# Altium PCB BACK_UP_05_10_Analizador_de_espectro.PcbDoc (part 1 of 2)
Units mil, origin at the board's own origin, x right, y up, seen from the top; angles counter-clockwise.
Board outline 6000 x 4000 mil, 2 copper layers (Top Layer, Bottom Layer); 140 components, 98 nets, 612 pads, 248 vias.
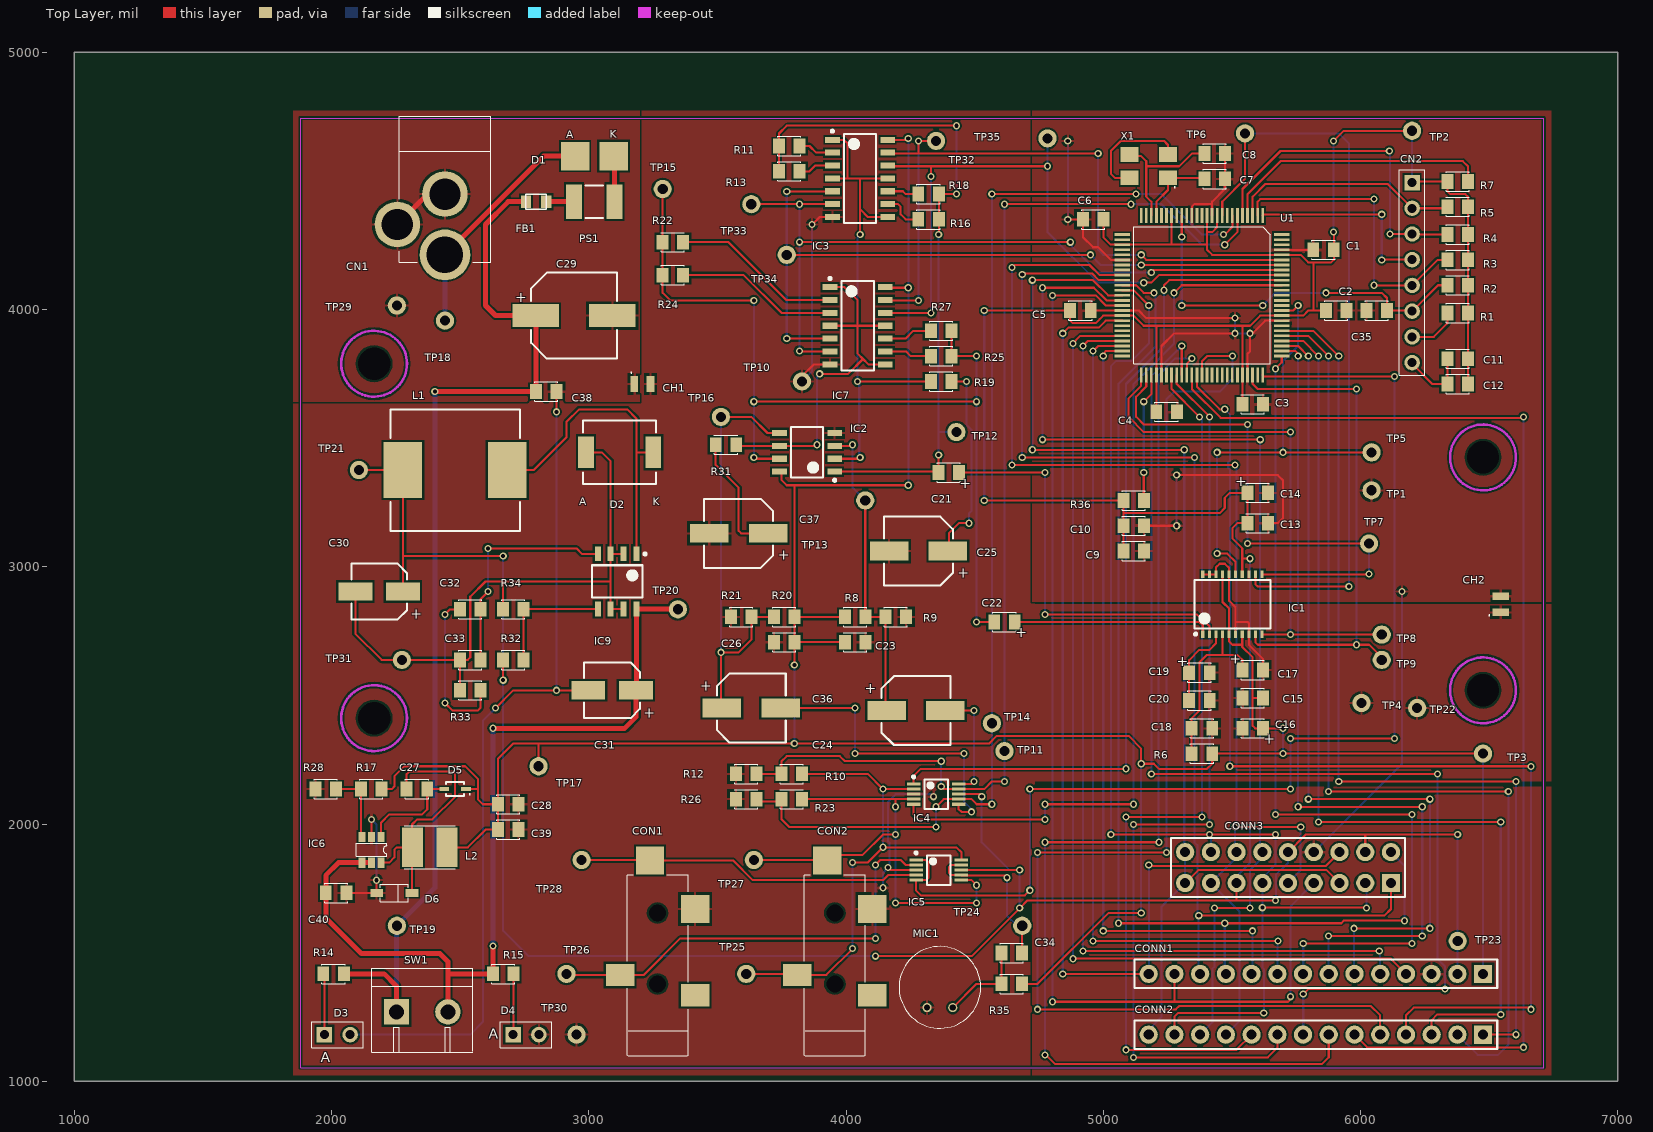
[diagram p0: Top Layer view]
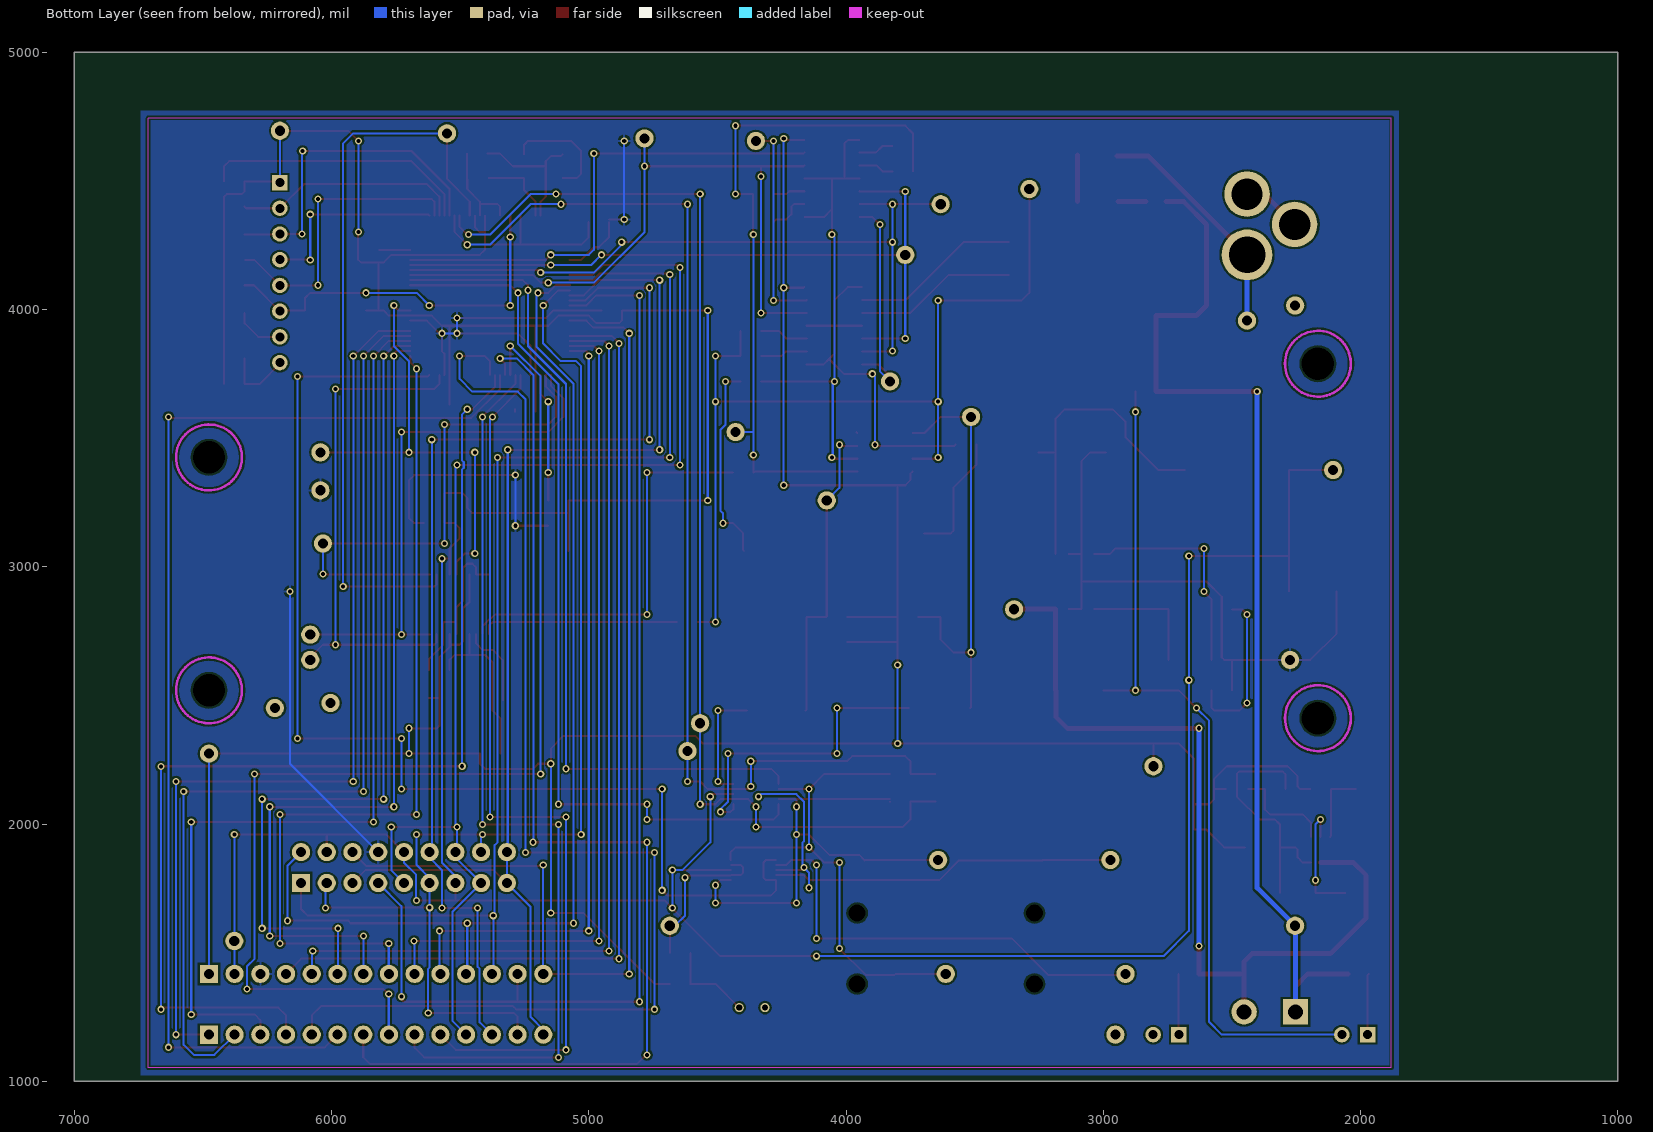
[diagram p1: Bottom Layer view, seen from below]

## Layer stack, top to bottom
Top Solder: solder mask 0.4, Solder Resist, Dk 3.5
Top Layer: signal copper 1.4
Dielectric 1: dielectric 12.6, FR-4, Dk 4.8
Bottom Layer: signal copper 1.4
Bottom Solder: solder mask 0.4, Solder Resist, Dk 3.5

## Board outline
1000,1000 7000,1000 7000,5000 1000,5000

## Design rules (kind name [scope] priority, off if disabled: settings)
Clearance [All] p1: gap=7.87
HoleSize [All] p1: absolutevalues=TRUE maxlimit=200 minlimit=1 maxpercent=80.000 minpercent=20.000
MinimumSolderMaskSliver [All] p1: minsoldermaskwidth=0.79
PolygonConnect [All] p1: connectstyle=Relief reliefconductorwidth=10 reliefentries=4 polygonreliefangle="90 Angle" airgapwidth=10
RoutingVias [All] p1: holewidth=16 width=28 viastyle="Through Hole" minholewidth=16 minwidth=28 maxholewidth=16 maxwidth=28
SolderMaskExpansion [All] p1: expansion=4
Width [All] p1: maxlimit=250 minlimit=8 preferedwidth=8
28 further rules are at their usual default settings.

## Classes and differential pairs
component class U_adc: C13 C14 C15 C16 C17 C18 C19 C20 C21 C22 IC1 R6 TP1 TP2 TP3 TP4 TP5 TP6 TP7 TP8 TP9 TP10
component class U_AGC: C23 C24 C25 C26 C36 C37 IC2 IC3 IC4 IC7 R8 R9 R10 R11 R12 R13 R16 R18 R19 R20 R21 R22 R23 R24 R25 R26 R27 R31 TP11 TP12 TP13 TP14 TP15 TP16 TP32 TP33 TP34 TP35
component class U_Fuente: C27 C28 C29 C30 C31 C32 C33 C38 C39 C40 CH1 CH2 CN1 D1 D2 D3 D4 D5 D6 FB1 IC6 IC9 L1 L2 PS1 R14 R15 R17 R28 R32 R33 R34 SW1 TP17 TP18 TP19 TP20 TP21 TP29 TP30 TP31
component class U_Signal_imputs: C34 CON1 CON2 IC5 MIC1 R35 TP22 TP23 TP24 TP25 TP26 TP27 TP28
component class U_uc: c1 c2 c4 C4 c5 c6 c7 c8 c9 c10 c11 C12 c35 CN2 CONN1 CONN2 CONN3 R1 R2 R3 R4 R5 R7 R36 U1 X1

## Components (designator, comment, footprint, x,y, rotation, side; value= is the part's Value field where it differs from the comment)
C1 "100nF 25V X7R Ceramic" C_0805 5856.3,4232.28 r180 top (schematic designator c1)
C2 "100nF 25V X7R Ceramic" C_0805 5905.51,3996.06 r0 top (schematic designator c2)
C3 "100nF 25V X7R Ceramic" C_0805 5580.71,3631.89 r0 top (schematic designator c3)
C4 "100nF 25V X7R Ceramic" C_0805 5246.06,3602.36 r0 top (schematic designator c4)
C5 "100nF 25V X7R Ceramic" C_0805 4911.42,3996.06 r0 top (schematic designator c5)
C6 "100nF 25V X7R Ceramic" C_0805 4960.63,4350.39 r180 top (schematic designator c6)
C7 "18pF 50V COG Ceramic" C_0805 5433.07,4507.87 r180 top (schematic designator c7)
C8 "18pF 50V COG Ceramic" C_0805 5433.07,4606.3 r180 top (schematic designator c8)
C9 "1uF 6V3 X7R Ceramic" C_0805 5118.11,3061.02 r0 top (schematic designator c9)
C10 "10nF 25V X7R Ceramic" C_0805 5118.11,3159.45 r0 top (schematic designator c10)
C11 "10nF 25V X7R Ceramic" C_0805 6377.95,3809.06 r180 top (schematic designator c11)
C12 "100nF 25V X7R Ceramic" C_0805 6377.95,3710.63 r180 top (schematic designator c12)
C13 "100nF 16V Ceramic" C_0805 5600.39,3169.29 r180 top
C14 "10uF 6V3 Tantalium" C_0805_POL 5600.39,3287.4 r0 top
C15 "100nF 16V Ceramic" C_0805 5580.71,2490.16 r0 top
C16 "10uF 6V3 Tantalium" C_0805_POL 5580.71,2372.05 r180 top
C17 "10uF 6V3 Tantalium" C_0805_POL 5580.71,2598.43 r0 top
C18 "100nF 16V Ceramic" C_0805 5383.86,2372.05 r180 top
C19 "10uF 6V3 Tantalium" C_0805_POL 5374.02,2588.58 r0 top
C20 "100nF 16V Ceramic" C_0805 5374.02,2480.32 r180 top
C21 "1uF 16V Tantalium" C_0805_POL 4399.61,3366.14 r180 top
C22 "1uF 16V Tantalium" C_0805_POL 4616.14,2785.43 r180 top
C23 "1uF 16V Ceramic" C_0805 4035.43,2706.69 r0 top
C24 "100uF 16V Elect. Alum." C_AE7066X54M 4271.65,2440.94 r0 top
C25 "100uF 16V Elect. Alum." C_AE7066X54M 4281.5,3061.02 r180 top
C26 "1uF 16V Ceramic" C_0805 3760.47,2706.69 r180 top
C27 "100nF 16V X7R" C_0805 2332.05,2135.83 r180 top
C28 "10uF 10V X7R" C_0805 2687.01,2076.77 r0 top
C29 "100uF 50V ElecAlum" C_AE10083X105M 2942.91,3976.38 r0 top
C30 "100uF 6V3 ElecAlum" C_AE6553X54M 2185.04,2903.54 r180 top
C31 "4.7uF 50V ElecAlum" C_AE6553X54M 3090.55,2519.68 r180 top
C32 "15nF 50V Ceramic" C_0805 2539.37,2834.65 r180 top
C33 "100pF 25V Ceramic" C_0805 2539.37,2637.8 r180 top
C34 "2.2u 6V3 X5R Ceramic" C_0805 4644.84,1498.43 r0 top
C35 "100nF 25V X7R Ceramic" C_0805 6062.99,3996.06 r180 top (schematic designator c35)
C36 "100uF 16V Elect. Alum." C_AE7066X54M 3631.89,2450.79 r0 top
C37 "100uF 16V Elect. Alum." C_AE7066X54M 3582.68,3129.92 r180 top
C38 "100nF 35V Ceramic" C_0805 2834.65,3681.1 r0 top
C39 "10uF 10V X7R" C_0805 2687.01,1978.35 r0 top
C40 "2.2uF 50V X7R" C_0805 2017.72,1732.28 r0 top
CH1 "Choke" I_CHOQUE_DFN 3208.66,3710.63 r0 top
CH2 "Choke" I_CHOQUE_DFN 6545.28,2854.33 r90 top
CN1 "DC Jack" Jack_PJ002A 2440.95,4212.6 r90 top
CN2 "CONN_82" HDR_M_08P_0.1 6200.79,4143.7 r270 top
CON1 "AUD_IN" "AUDIO_JACK 3.5MM SMD" 3267.72,1515.75 r90 top
CON2 "AUD_IN" "AUDIO_JACK 3.5MM SMD" 3956.69,1515.75 r90 top
CONN1 "CON_14" "1x14x2.54 Pin Header TH V" 5826.77,1417.32 r180 top
CONN2 "CON_14" "1x14x2.54 Pin Header TH V" 5826.77,1181.1 r180 top
CONN3 "CON_18" "2x9x2.54 Pin Header TH V" 5718.5,1830.71 r180 top
D1 "CDBA140-G" D_DO-214AC_SCHOTTKY 3021.65,4596.46 r0 top
D2 "STPS3L40" D_M6959X25N 3120.08,3444.88 r0 top
D3 "LED" LED_TH 2022.44,1181.1 r0 top
D4 "LED" LED_TH 2755.91,1181.1 r0 top
D5 "1N4148WS" 1N4148WS 2480.32,2135.83 r180 top
D6 "MBRX160TP" SOD_123 2244.09,1732.28 r180 top
FB1 "Ferrite Bead" Ferrite_bead 2834.65,4419.29 r180 top
IC1 "PCM1802" SSOP_DB20 5501.97,2854.33 r90 top
IC2 "MCP6022" SOIC_D8 3848.43,3444.88 r180 top
IC3 "74LVC4066" SO14 4054.53,4509.8 r0 top
IC4 "TS5A23157" TSSOP50P490X110-10N 4350.39,2116.14 r0 top
IC5 "TS5A23157" TSSOP50P490X110-10N 4360.24,1820.87 r0 top
IC6 "MCP" SOT23_6P 2155.51,1899.61 r180 top
IC7 "74LVC4066" SO14 4045.28,3937.01 r0 top
IC9 "L5972D" SO8 3110.24,2942.91 r270 top
L1 "47uH" I_P128122X60N 1466.54,3917.32 r180 top
L2 "LQH44PN220MP0L" VLCF5028 2381.89,1909.45 r0 top
MIC1 "Mic" MIC_CMA-4544PF-W 4365,1365 r270 top
PS1 "Polyswitch" POLISWITCH_1 3021.65,4419.29 r180 top
R1 "10k 5% 1/8W" R_0805 6377.95,3986.22 r0 top
R2 "10k 5% 1/8W" R_0805 6377.95,4094.49 r0 top
R3 "10k 5% 1/8W" R_0805 6377.95,4192.91 r0 top
R4 "10k 5% 1/8W" R_0805 6377.95,4291.34 r0 top
R5 "10k 5% 1/8W" R_0805 6377.95,4399.61 r0 top
R6 "1k 1/8W" R_0805 5383.86,2273.62 r180 top
R7 "10k 5% 1/8W" R_0805 6377.95,4498.03 r180 top
R8 "100k 1/8W" R_0805 4036.06,2805.12 r180 top
R9 "100k 1/8W" R_0805 4193.54,2805.12 r180 top
R10 "100k 1/8W" R_0805 3789.37,2194.88 r180 top
R11 "590 1/8W" R_0805 3779.53,4635.83 r0 top
R12 "33k 1/8W" R_0805 3612.2,2194.88 r180 top
R13 "2k2 1/8W" R_0805 3779.53,4537.4 r0 top
R14 "Res1" R_0805 2007.87,1417.32 r180 top
R15 "Res1" R_0805 2667.32,1417.32 r180 top
R16 "3k9 1/8W" R_0805 4320.87,4350.39 r180 top
R17 "30k9 1%" R_0805 2154.88,2135.83 r0 top
R18 "100k 1/8W" R_0805 4320.87,4448.82 r180 top
R19 "1k 1/8W" R_0805 4370.08,3720.47 r0 top
R20 "100k 1/8W" R_0805 3760.47,2805.12 r0 top
R21 "100k 1/8W" R_0805 3593.15,2805.12 r0 top
R22 "590 1/8W" R_0805 3326.77,4261.81 r0 top
R23 "100k 1/8W" R_0805 3789.37,2096.46 r180 top
R24 "2k2 1/8W" R_0805 3326.77,4133.86 r0 top
R25 "3k9 1/8W" R_0805 4370.08,3818.9 r180 top
R26 "33k 1/8W" R_0805 3612.2,2096.46 r180 top
R27 "100k 1/8W" R_0805 4370.08,3917.32 r180 top
R28 "30k9 1%" R_0805 1977.72,2135.83 r0 top
R31 "1k 1/8W" R_0805 3533.46,3474.41 r180 top
R32 "8k2 1/4W" R_0805 2706.69,2637.8 r0 top
R33 "10k 1/4W" R_0805 2539.37,2519.68 r0 top
R34 "5k1 1/4W" R_0805 2706.69,2834.65 r0 top
R35 "2k2 1/8W" R_0805 4644.84,1378.43 r0 top
R36 "10k 5% 1/8W" R_0805 5118.11,3257.87 r180 top
SW1 "Switch" BORNERA_2X5MM 2352.36,1269.68 r180 top
TP1 "TP" TP 6043.31,3297.24 r0 top
TP2 "TP" TP 6200.79,4694.88 r0 top
TP3 "TP" TP 6476.38,2273.62 r0 top
TP4 "TP" TP 6003.94,2470.47 r0 top
TP5 "TP" TP 6043.31,3444.88 r0 top
TP6 "TP" TP 5551.18,4685.04 r0 top
TP7 "TP" TP 6033.46,3090.55 r0 top
TP8 "TP" TP 6082.68,2736.22 r0 top
TP9 "TP" TP 6082.68,2637.8 r0 top
TP10 "TP" TP 3828.74,3720.47 r90 top
TP11 "TP" TP 4616.14,2283.46 r0 top
TP12 "TP" TP 4429.13,3523.62 r90 top
TP13 "TP" TP 4074.8,3257.87 r90 top
TP14 "TP" TP 4566.93,2391.73 r90 top
TP15 "TP" TP 3287.4,4468.5 r90 top
TP16 "TP" TP 3513.78,3582.68 r90 top
TP17 "TP" TP 2805.12,2224.41 r90 top
TP18 "TP" TP 2440.94,3956.69 r90 top
TP19 "TP" TP 2253.94,1604.33 r90 top
TP20 "TP" TP 3346.46,2834.65 r90 top
TP21 "TP" TP 2106.3,3375.98 r0 top
TP22 "TP" TP 6220.47,2450.79 r90 top
TP23 "TP" TP 6377.95,1545.28 r90 top
TP24 "TP" TP 4685.04,1604.33 r90 top
TP25 "TP" TP 3612.2,1417.32 r90 top
TP26 "TP" TP 2913.39,1417.32 r90 top
TP27 "TP" TP 3641.73,1860.24 r90 top
TP28 "TP" TP 2972.44,1860.24 r90 top
TP29 "TP" TP 2253.94,4015.75 r90 top
TP30 "TP" TP 2952.76,1181.1 r90 top
TP31 "TP" TP 2273.62,2637.8 r0 top
TP32 "TP" TP 4350.39,4655.51 r90 top
TP33 "TP" TP 3631.89,4409.45 r90 top
TP34 "TP" TP 3769.69,4212.6 r90 top
TP35 "TP" TP 4783.46,4665.35 r90 top
U1 "LPC1769FBD100" LQFP100 5383.86,4055.12 r180 top
X1 "XTAL_HF" ABMC_XTAL 5177.17,4557.09 r180 top

## Footprints (in the part's own frame and the unit in brackets; to place one, negate y for a bottom-side part, rotate by r counter-clockwise, add the part's x,y. Pads: shape width x height; smd on the part's side, far side on the other; paste and mask are expansions set on the pad)
1N4148WS [mm] "SODFL, 2-Leads, Body 1.25x2.50mm, IPC Medium Density"
  rect 0.95x0.4 smd: 1(-1.075,0) 2(1.075,0)
  silkscreen extent -1.5,-0.7 0.9,0.7, body extent -0.9,-0.67 0.9,0.67, height 0.9
"1x14x2.54 Pin Header TH V" [mm] "1x14x2.54 Pin Header TH V"
  rect 1.8x1.8 hole 1: 1(-16.51,0)
  round 1.8 hole 1: 2(-13.97,0) 3(-11.43,0) 4(-8.89,0) 5(-6.35,0) 6(-3.81,0) 7(-1.27,0) 8(1.27,0) 9(3.81,0) 10(6.35,0) 11(8.89,0) 12(11.43,0) 13(13.97,0) 14(16.51,0)
  silkscreen extent -17.91,-1.4 17.91,1.4
"2x9x2.54 Pin Header TH V" [mm] "2x9x2.54 Pin Header TH V"
  rect 1.8x1.8 hole 1: 1(-10.16,1.524)
  round 1.8 hole 1: 2(-7.62,1.524) 3(-5.08,1.524) 4(-2.54,1.524) 5(0,1.524) 6(2.54,1.524) 7(5.08,1.524) 8(7.62,1.524) 9(10.16,1.524) 10(-10.16,-1.524) 11(-7.62,-1.524) 12(-5.08,-1.524) 13(-2.54,-1.524) 14(0,-1.524) 15(2.54,-1.524) 16(5.08,-1.524) 17(7.62,-1.524) 18(10.16,-1.524)
  silkscreen extent -11.56,-2.92 11.56,2.92
ABMC_XTAL [mm] "ABM3C-12.000MHZ-D4Y-T"
  rect 1.75x1.45 smd: 1(-1.9,1.15) 2(-1.9,-1.15) 3(1.9,-1.15) 4(1.9,1.15)
  silkscreen extent -2.63,2.03 -2.53,2.12, body extent -2.58,-1.68 2.57,1.68, height 1.3
"AUDIO_JACK 3.5MM SMD" [mm] "SJ-3524-SMT"
  rect 2.8x2.8 smd: 1(3.9,-3.7) 2(8.7,0.75)
  rect 2.2x2.8 smd: 3(-2.6,3.7) 4(-4.6,-3.7)
  round 0 hole 1.7: ""(-3.5,0) ""(3.5,0)
  silkscreen extent -10.6,-3 7.3,3
BORNERA_2X5MM [mm]
  rect 2.5x2.5 hole 1.5: 1(2.54,0)
  round 2.5 hole 1.5: 2(-2.54,0)
  silkscreen extent -5,-4.3 5,4
C_0805 [mm]
  rect 0.5x1.25 on Mech3: 0(-0.75,0) 0(0.75,0)
  rect 1.175x1.45 smd: 1(-1.016,0) 2(1.016,0)
  silkscreen extent -1.14,-0.95 1.14,0.95
C_0805_POL [mm]
  rect 0.5x1.25 on Mech3: 0(-0.75,0) 0(0.75,0)
  rect 1.175x1.45 smd: 1(-1.016,0) 2(1.016,0)
  silkscreen extent -1.14,-0.95 1.14,0.95
C_AE6553X54M [mm] "Aluminum Electrolytic Capacitor, 4.7uF, 50V"
  rect 3.35x1.8 smd: 1(-2.35,0) 2(2.35,0)
  silkscreen extent -2.75,-2.75 2.75,2.75, body extent -2.75,-2.75 2.75,2.75, height 5.4
C_AE7066X54M [mm] "Aluminum Electrolytic Capacitor, 100uF, 16V"
  rect 3.8x1.85 smd: 1(-2.9,0) 2(2.9,0)
  silkscreen extent -3.4,-3.4 3.4,3.4, body extent -3.4,-3.4 3.4,3.4, height 5.4
C_AE10083X105M [mm] "Aluminum Electrolytic Capacitor, 100uF, 50V"
  rect 4.6x2.25 smd: 1(-3.775,0) 2(3.775,0)
  silkscreen extent -4.25,-4.25 4.25,4.25, body extent -4.25,-4.25 4.25,4.25, height 10.5
D_DO-214AC_SCHOTTKY [mm] "CDBA140-G"
  rect 2.8x2.8 smd: 1(-1.9,0) 2(1.9,0)
  body extent -2.25,-1.4 2.25,1.39, height 2.29
D_M6959X25N [mm] "Diodo STPS3L40-Y"
  rect 1.54x3.14 smd: 1(-3.325,0) 2(3.325,0)
  silkscreen extent -3.6,-3.15 3.6,3.15, body extent -3.57,-3.13 3.57,3.13, height 2.45
Ferrite_bead [mm]
  rect 1x1.25 smd: 1(0,0) 2(2,0)
  silkscreen extent 0,-0.75 2,0.75
HDR_M_08P_0.1 [mil]
  rect 60x60 hole 35: 1(-350,0)
  round 60 hole 35: 2(-250,0) 3(-150,0) 4(-50,0) 5(50,0) 6(150,0) 7(250,0) 8(350,0)
  silkscreen extent -400,-50 400,50
I_CHOQUE_DFN [mm] "Chip Power Inductor BRC2012T2R2MD"
  rect 0.75x1.6 smd: 1(-0.8,0) 2(0.8,0)
  silkscreen extent -1.15,1.08 -1.05,1.17, body extent -1.1,-0.72 1.1,0.72, height 1.4
I_P128122X60N [mm] "Inductor SMD 744771147"
  rect 3.8x5.5 smd: 1(-30.9,13.75) 2(-20.6,13.75)
  silkscreen extent -32.15,7.75 -19.35,19.75, body extent -32.15,7.75 -19.35,19.75, height 6
Jack_PJ002A [mm]
  round 5 hole 3.6: 1(0,0)
  round 4.5 hole 3.1: 2(6,0) 3(3,4.7)
  silkscreen extent -0.75,-4.5 13.7,4.5
LED_TH [mil]
  rect 60x60 hole 35 paste+0: 1(-50,0)
  round 60 hole 35 paste+0: 2(50,0)
  silkscreen extent -100,-50 100,50
LQFP100 [mm]
  rect 0.27x1.5 smd: 1(-6,-7.875) 2(-5.5,-7.875) 3(-5,-7.875) 4(-4.5,-7.875) 5(-4,-7.875) 6(-3.5,-7.875) 7(-3,-7.875) 8(-2.5,-7.875) 9(-2,-7.875) 10(-1.5,-7.875) 11(-1,-7.875) 12(-0.5,-7.875) 13(0,-7.875) 14(0.5,-7.875) 15(1,-7.875) 16(1.5,-7.875) 17(2,-7.875) 18(2.5,-7.875) 19(3,-7.875) 20(3.5,-7.875) 21(4,-7.875) 22(4.5,-7.875) 23(5,-7.875) 24(5.5,-7.875) 25(6,-7.875) 51(6,7.875) 52(5.5,7.875) 53(5,7.875) 54(4.5,7.875) 55(4,7.875) 56(3.5,7.875) 57(3,7.875) 58(2.5,7.875) 59(2,7.875) 60(1.5,7.875) 61(1,7.875) 62(0.5,7.875) 63(0,7.875) 64(-0.5,7.875) 65(-1,7.875) 66(-1.5,7.875) 67(-2,7.875) 68(-2.5,7.875) 69(-3,7.875) 70(-3.5,7.875) 71(-4,7.875) 72(-4.5,7.875) 73(-5,7.875) 74(-5.5,7.875) 75(-6,7.875)
  rect 1.5x0.27 smd: 26(7.875,-6) 27(7.875,-5.5) 28(7.875,-5) 29(7.875,-4.5) 30(7.875,-4) 31(7.875,-3.5) 32(7.875,-3) 33(7.875,-2.5) 34(7.875,-2) 35(7.875,-1.5) 36(7.875,-1) 37(7.875,-0.5) 38(7.875,0) 39(7.875,0.5) 40(7.875,1) 41(7.875,1.5) 42(7.875,2) 43(7.875,2.5) 44(7.875,3) 45(7.875,3.5) 46(7.875,4) 47(7.875,4.5) 48(7.875,5) 49(7.875,5.5) 50(7.875,6) 76(-7.875,6) 77(-7.875,5.5) 78(-7.875,5) 79(-7.875,4.5) 80(-7.875,4) 81(-7.875,3.5) 82(-7.875,3) 83(-7.875,2.5) 84(-7.875,2) 85(-7.875,1.5) 86(-7.875,1) 87(-7.875,0.5) 88(-7.875,0) 89(-7.875,-0.5) 90(-7.875,-1) 91(-7.875,-1.5) 92(-7.875,-2) 93(-7.875,-2.5) 94(-7.875,-3) 95(-7.875,-3.5) 96(-7.875,-4) 97(-7.875,-4.5) 98(-7.875,-5) 99(-7.875,-5.5) 100(-7.875,-6)
  silkscreen extent -6.75,-6.75 6.75,6.75
MIC_CMA-4544PF-W [mm] "CMA-4544PF-W"
  round 0.9 hole 0.6: 1(2,1.27) 2(2,-1.27)
  silkscreen extent -4.04,-4.03 4.04,4.04
POLISWITCH_1 [mm]
  rect 1.55x3.4 smd: 1(-2,0) 2(2,0)
  silkscreen extent -0.85,-1.6 0.85,1.6, body extent -2.42,-1.71 2.41,1.71, height 0.85
R_0805 [mm]
  rect 0.4x1.25 on Mech3: 0(-0.8,0) 0(0.8,0)
  rect 1.175x1.45 smd: 1(-1.016,0) 2(1.016,0)
  silkscreen extent -1.14,-0.95 1.14,0.95
SO8 [mm] "Switching Regulator L5972D"
  rect 1.45x0.6 smd: 1(-2.725,1.905) 2(-2.725,0.635) 3(-2.725,-0.635) 4(-2.725,-1.905) 5(2.725,-1.905) 6(2.725,-0.635) 7(2.725,0.635) 8(2.725,1.905)
  silkscreen extent -2.85,-2.5 1.6,2.88, body extent -2,-2.5 2,2.5, height 1.75
SO14 [mm] "Quad_Bilateral_Switch 74LVC4066"
  rect 1.45x0.6 smd: 1(-2.725,3.81) 2(-2.725,2.54) 3(-2.725,1.27) 4(-2.725,0) 5(-2.725,-1.27) 6(-2.725,-2.54) 7(-2.725,-3.81) 8(2.725,-3.81) 9(2.725,-2.54) 10(2.725,-1.27) 11(2.725,0) 12(2.725,1.27) 13(2.725,2.54) 14(2.725,3.81)
  silkscreen extent -2.85,-4.4 1.6,4.78, body extent -2,-4.4 2,4.4, height 1.75
SOD_123 [mm]
  rect 1.25x0.8 smd: 1(1.75,0) 2(-1.75,0)
  silkscreen extent -1.38,-0.88 1.38,0.88
SOIC_D8 [mm] "MCP6022"
  rect 1.45x0.6 smd: 1(-2.725,1.905) 2(-2.725,0.635) 3(-2.725,-0.635) 4(-2.725,-1.905) 5(2.725,-1.905) 6(2.725,-0.635) 7(2.725,0.635) 8(2.725,1.905)
  silkscreen extent -2.85,-2.5 1.6,2.88, body extent -2,-2.5 2,2.5, height 1.75
SOT23_6P [mil]
  rect 27x40 smd: 1(-37.5,-50) 2(0,-50) 3(37.5,-50) 4(37.5,50) 5(0,50) 6(-37.5,50)
  silkscreen extent -60,-25 60,25
SSOP_DB20 [mm] "PCM1802 Single-Ended Analog-Input 24-Bit"
  rect 0.75x0.3 smd: 1(-2.95,2.925) 2(-2.95,2.275) 3(-2.95,1.625) 4(-2.95,0.975) 5(-2.95,0.325) 6(-2.95,-0.325) 7(-2.95,-0.975) 8(-2.95,-1.625) 9(-2.95,-2.275) 10(-2.95,-2.925) 11(2.95,-2.925) 12(2.95,-2.275) 13(2.95,-1.625) 14(2.95,-0.975) 15(2.95,-0.325) 16(2.95,0.325) 17(2.95,0.975) 18(2.95,1.625) 19(2.95,2.275) 20(2.95,2.925)
  silkscreen extent -3.07,-3.75 2.4,3.75, body extent -2.8,-3.75 2.8,3.75, height 2
TP [mm]
  round 1.8 hole 1: 1(0,0)
TSSOP50P490X110-10N [mm] "TSSOP, 10-Leads, Body 3.00x3.00mm, Pitch 0.50mm, IPC Medium Density"
  rect 1.35x0.3 smd: 1(-2.225,1) 2(-2.225,0.5) 3(-2.225,0) 4(-2.225,-0.5) 5(-2.225,-1) 6(2.225,-1) 7(2.225,-0.5) 8(2.225,0) 9(2.225,0.5) 10(2.225,1)
  silkscreen extent -2.35,-1.45 1.15,1.82, body extent -1.55,-1.45 1.55,1.45, height 1.1
VLCF5028 [mm]
  rect 2.1x3.9 smd: 1(-1.7,0) 2(1.7,0)
  silkscreen extent -2.5,-2.12 2.5,2.12

## Part data
C1 C2 C3 C4 C5 C6 C7 C8 C9 C10 C11 C12 C13 C15 C18 C20 C23 C26 C27 C28 C32 C33 C34 C35 C38 C39 C40: library part Cap1, "Capacitor"
C14 C16 C17 C19 C21 C22 C24 C25 C29 C30 C31 C36 C37: library part Cap_Elec, "Capacitor"
CN1: library part Barrel_jack, "Connector"
CON1 CON2: library part Jack_1
CONN1 CONN2: "CONN TFT 3.5"
CONN3: "CON_TFT_2.8"
D1: library part Diodo_Schottky, "Diodo Schottky"
D2: library part DIODO, "Diode"
D5: library part DIODO, "Diode signal"
D6: library part Diodo_Schottky
IC2: library part OpAmp_Dual
IC3 IC7: library part Q_B_Switch_2
IC4 IC5: library part A_SW_2x2:1_VSSOP, "Analog Switch"
IC6: library part "Sw Source", "Switching Source"
IC9: "Fuente Switching"
L1 L2: library part Inductor, "Inductor"
MIC1: "Microfono"
PS1: library part Poliswitch, "Polishwitch"
R1 R2 R3 R4 R5 R6 R7 R8 R9 R10 R11 R12 R13 R16 R17 R18 R19 R20 R21 R22 R23 R24 R25 R26 R27 R28 R31 R32 R33 R34 R35 R36: library part Res1, "Resistor"
R14 R15: "Resistor"
SW1: library part SW
TP1 TP2 TP3 TP4 TP5 TP6 TP7 TP8 TP9 TP10 TP11 TP12 TP13 TP14 TP15 TP16 TP17 TP18 TP19 TP20 TP21 TP22 TP23 TP24 TP25 TP26 TP27 TP28 TP29 TP30 TP31 TP32 TP33 TP34 TP35: library part "Test Point", "Test Point"
U1: library part LPC1768FBD100, "CPU Cortex M3"
X1: "Crystal"

## Free pads (board coordinates)
  round 0 hole 125.98: M_HOLE(2165.35,2411.42) M_HOLE(2165.35,3789.37) M_HOLE(6476.38,2519.68) M_HOLE(6476.38,3425.2)

## Via types
v1: diameter 28, hole 16, Top Layer to Bottom Layer, 248 vias

## Nets (pads, with @x,y where several pads share a name; then routed paths per layer and width w, separated by ;. In a path a pad name is that pad's centre, name@x,y a point inside that pad or via, vN(x,y) a via of type N, cw(c..) or ccw(c..) an arc to the next point about the centre after c; other vN are vias at no path point)
+5V: C15.2 C16.1 C23.1 C26.1 C28.1 C39.1 CONN1.1 D5.1 IC1.5 IC1.7 IC1.17 IC2.8 IC3.14 IC7.14 L2.2 R6.1 R8.2 R17.2 R20.2 R35.2 TP3.1 TP17.1 | length 11676.7
  Top Layer w8: R17.2@2194.88,2135.83 2234.25,2135.83 2244.09,2145.67 2244.09,2185.04 2283.46,2224.41 2519.69,2224.41 2568.9,2175.2 2568.9,2135.83 ; L2.2@2448.82,1909.45 2529.53,1909.45 2598.43,1978.35 C39.1@2647.01,1978.35 C28.1@2647.01,2076.77 ; D5.1@2522.64,2135.83 2568.9,2135.83 ; TP17.1@2805.12,2224.41 2805.12,2312.99 ; IC2.8@3741.14,3369.88 3750,3361.02 3750,3336.61 3769.69,3316.93 3799.21,3316.93 ; v1(3799.21,2618.11) 3800.47,2619.37 C26.1@3800.47,2706.69 ; C23.1@3995.43,2706.69 C26.1@3800.47,2706.69 ; R8.2@3996.06,2805.12 R20.2@3800.47,2805.12 ; IC3.14@4161.81,4659.8 4236.57,4659.8 v1(4242.13,4665.35) ; IC7.14@4162.4,4087.01 4164.76,4084.65 v1(4242.13,4084.65) ; v1(4242.13,3316.93) 3799.21,3316.93 ; R35.2@4684.84,1378.43 4744.57,1378.43 5019.69,1653.54 v1(5147.64,1653.54) ; IC1.17@5463.58,2970.47 5463.58,2863.19 5489.17,2837.6 IC1.5@5489.17,2738.19 5489.17,2709.65 5501.97,2696.85 5540.35,2696.85 ; IC1.7@5540.35,2738.19 5540.35,2696.85 ; C15.2@5620.71,2490.16 5580.71,2490.16 ; v1(5698.82,2372.05) C16.1@5620.71,2372.05 5590.55,2372.05 5580.71,2381.89 5580.71,2490.16 ; TP3.1@6476.38,2273.62 v1(5698.82,2273.62) R6.1@5423.86,2273.62 5423.86,2234.88 5403.54,2214.57 5216.54,2214.57 5196.85,2234.25 v1(5147.64,2234.25) 5147.64,2293.31 5098.43,2342.52 4586.61,2342.52 4557.09,2312.99 v1(3799.21,2312.99) 2805.12,2312.99 ; 2568.9,2135.83 2568.9,2096.46 2588.58,2076.77 C28.1@2647.01,2076.77 ; C28.1@2647.01,2076.77 2647.01,2253.31 2706.69,2312.99 2805.12,2312.99 ; 3799.21,3316.93 3800.47,3315.67 R20.2@3800.47,2805.12 ; C26.1@3800.47,2706.69 R20.2@3800.47,2805.12 ; 5540.35,2696.85 5540.35,2687.99 5580.71,2647.64 5580.71,2490.16
  Bottom Layer w8: v1(3799.21,2312.99) v1(3799.21,2618.11) ; v1(4242.13,3316.93) v1(4242.13,4084.65) v1(4242.13,4665.35) ; v1(5147.64,1653.54) v1(5147.64,2234.25) ; v1(5698.82,2273.62) v1(5698.82,2372.05) ; TP3.1@6476.38,2273.62 6476.38,1417.72 CONN1.1@6476.77,1417.32
AGND: C15.1 C16.2 C17.2 C18.1 C19.2 C20.1 C23.2 C25.2 C26.2 C28.2 C37.2 C39.2 C40.2 CH1.2 CH2.1 CON1.1 CON2.1 D4.2 D6.1 IC1.6 IC1.8 IC1.16 IC1.18 IC1.19 IC1.20 IC2.4 IC3.7 IC4.3 IC5.3 IC6.2 IC7.7 MIC1.2 R9.1 R12.2 R21.1 R26.2 R28.1 TP4.1 TP10.1 TP22.1 TP30.1 | length 2672.8
  Top Layer w8: C40.2@2057.72,1732.28 D6.1@2175.2,1732.28 v1(2175.2,1781.5) ; IC6.2@2155.51,1949.61 v1(2155.51,2017.72) ; TP10.1@3828.74,3720.47 3828.74,3740.16 3875.59,3787.01 IC7.7@3937.99,3787.01 ; v1(3868.11,4330.71) 3897.2,4359.8 IC3.7@3947.24,4359.8 ; IC2.4@3955.71,3519.88 IC2.4@3959.45,3523.62 ; v1(4163.39,1830.71) 4173.23,1820.87 IC5.3@4272.64,1820.87 ; IC1.20@5386.81,2970.47 IC1.19@5412.4,2970.47 IC1.18@5437.99,2970.47 5437.99,2997.05 5452.76,3011.81 5472.44,3011.81 5489.17,2995.08 IC1.16@5489.17,2970.47 5489.17,2867.13 5514.76,2841.54 IC1.6@5514.76,2738.19 ; 5514.76,2785.43 5561.02,2785.43 5565.94,2780.51 IC1.8@5565.94,2738.19 5565.94,2696.85 5620.71,2642.09 C17.2@5620.71,2598.43
  Bottom Layer w8: v1(2155.51,2017.72) 2175.2,1998.03 v1(2175.2,1781.5) ; TP10.1@3828.74,3720.47 3868.11,3759.84 v1(3868.11,4330.71) ; v1(4143.7,1751.97) 4143.7,1811.02 v1(4163.39,1830.71) 4169.7,1837.02 4169.7,1926.53 4163.39,1932.85 4163.39,2086.61 4192.91,2116.14 4330.7,2116.14 v1(4340.54,2106.3)
CTRL_MUX: IC5.1 IC5.5 U1.75 | length 4591.1
  Top Layer w8: IC5.1@4272.64,1860.24 4311.02,1860.24 4320.87,1850.39 4320.87,1791.34 4311.02,1781.5 IC5.5@4272.64,1781.5 4272.64,1741.14 4291.34,1722.44 4694.88,1722.44 v1(4714.57,1742.13) ; v1(4714.57,2135.83) v1(5728.35,2135.83) ; U1.75@5620.08,3745.08 5625,3740.16 v1(6131.89,3740.16) ; v1(5728.35,2332.68) v1(6131.89,2332.68)
  Bottom Layer w8: v1(4714.57,1742.13) v1(4714.57,2135.83) ; v1(5728.35,2135.83) v1(5728.35,2332.68) ; v1(6131.89,2332.68) v1(6131.89,3740.16)
D/C: CONN1.11 CONN3.10 U1.36 | length 4251.8
  Top Layer w8: v1(5059.06,1614.17) v1(5472.44,1614.17) 5925.2,1614.17 5935.04,1624.02 v1(6171.26,1624.02) ; U1.36@5073.82,4094.49 5127.95,4094.49 5157.49,4064.95 v1(5196.84,4064.95)
  Bottom Layer w8: v1(5059.06,1614.17) 5059.06,3710.63 5203.17,3854.74 5203.17,4058.63 v1(5196.84,4064.95) ; v1(5472.44,1614.17) 5472.44,1421.65 CONN1.11@5476.77,1417.32 ; CONN3.10@6118.5,1890.71 6171.26,1837.95 v1(6171.26,1624.02)
E1: IC3.13 IC7.13 TP32.1 U1.95 | length 2791.6
  Top Layer w8: IC7.13@4152.56,4037.01 4154.13,4035.43 v1(4281.5,4035.43) ; IC3.13@4161.81,4609.8 4165.31,4606.3 4281.5,4606.3 ; TP32.1@4350.39,4655.51 v1(4281.5,4655.51) 4281.5,4606.3 ; v1(4980.31,4606.3) 4281.5,4606.3 ; v1(5147.64,4212.6) 5167.32,4192.91 U1.95@5693.9,4192.91
  Bottom Layer w8: v1(4281.5,4035.43) v1(4281.5,4655.51) ; v1(4980.31,4606.3) 4980.31,4232.28 5000,4212.6 v1(5147.64,4212.6)
E2: IC3.5 IC7.5 TP34.1 U1.94 | length 2858.7
  Top Layer w8: v1(3769.68,3887.8) 3770.47,3887.01 IC7.5@3937.99,3887.01 ; TP34.1@3769.69,4212.6 v1(4950.79,4212.6) ; v1(3769.69,4458.66) 3947.24,4458.66 IC3.5@3947.24,4459.8 ; v1(5147.64,4173.23) U1.94@5693.9,4173.23
  Bottom Layer w8: v1(3769.68,3887.8) TP34.1@3769.69,4212.6 v1(3769.69,4458.66) ; v1(4950.79,4212.6) 4990.16,4173.23 v1(5147.64,4173.23)
E3: IC3.6 IC7.6 TP33.1 U1.93 | length 2939.9
  Top Layer w8: TP33.1@3631.89,4409.45 v1(3818.9,4409.45) 3946.89,4409.45 IC3.6@3947.24,4409.8 ; v1(3818.9,3838.58) 3820.47,3837.01 IC7.6@3937.99,3837.01 ; v1(3818.9,4261.81) v1(4872.05,4261.81) ; v1(5187.01,4143.7) 5196.85,4153.54 U1.93@5693.9,4153.54
  Bottom Layer w8: v1(3818.9,3838.58) v1(3818.9,4261.81) v1(3818.9,4409.45) ; v1(4872.05,4261.81) 4872.05,4251.97 4980.32,4143.7 v1(5187.01,4143.7)
E4: IC3.12 IC7.12 TP35.1 U1.92 | length 2740.5
  Top Layer w8: IC7.12@4152.56,3987.01 4153.35,3986.22 v1(4330.71,3986.22) ; IC3.12@4161.81,4559.8 4164.53,4557.09 4330.71,4557.09 ; v1(4330.71,4517.72) 4330.71,4557.09 ; v1(4783.46,4557.09) 4330.71,4557.09 ; v1(5157.48,4104.33) 5187.01,4104.33 5216.54,4133.86 U1.92@5693.9,4133.86
  Bottom Layer w8: v1(4330.71,3986.22) v1(4330.71,4517.72) ; TP35.1@4783.46,4665.35 v1(4783.46,4557.09) 4783.46,4301.18 4980.31,4104.33 v1(5157.48,4104.33)
EARTH: C29.2 C31.2 C38.2 CH1.1 CN1.2 CN1.3 D3.2 TP29.1 | length 3561.8
  Top Layer w8: CN1.2@2374.02,4448.82 CN1.2@2440.95,4448.82 ; v1(2637.8,2450.79) 2706.69,2519.68 v1(2874.02,2519.68) C31.2@2998.03,2519.68 ; v1(2874.02,3602.36) 2874.65,3602.99 C38.2@2874.65,3681.1
  Top Layer w19.68: CN1.3@2255.91,4330.71 CN1.2@2374.02,4448.82
  Bottom Layer w8: D3.2@2072.44,1181.1 2539.37,1181.1 2588.58,1230.31 2588.58,2401.57 v1(2637.8,2450.79) ; v1(2874.02,2519.68) v1(2874.02,3602.36)
GND: C1.2 C2.2 C3.2 C4.2 C5.2 C6.2 C7.1 C8.1 C9.2 C10.2 C13.1 C14.2 C30.2 C33.2 C35.2 CH2.2 CONN1.3 CONN3.13 D2.1 IC1.13 IC9.2 IC9.3 IC9.6 IC9.7 R33.1 R34.1 TP1.1 TP31.1 U1.11 U1.15 U1.31 U1.41 U1.55 U1.72 U1.83 U1.97 | length 7133.7
  Top Layer w8: C30.2@2092.52,2903.54 2092.52,2740.16 2194.88,2637.8 C33.2@2499.37,2637.8 ; R33.1@2499.37,2519.68 C33.2@2499.37,2637.8 ; R34.1@2666.69,2834.65 2666.69,2942.28 2667.32,2942.91 ; D2.1@2989.17,3444.88 3051.18,3444.88 3085.24,3410.83 IC9.3@3085.24,3050.2 ; 3085.24,2942.91 2667.32,2942.91 ; IC9.7@3135.24,2835.63 IC9.6@3085.24,2835.63 IC9.3@3085.24,3050.2 ; IC9.2@3135.24,3050.2 IC9.3@3085.24,3050.2 ; v1(4862.2,4350.39) C6.2@4920.63,4350.39 ; C6.2@4920.63,4340.55 4920.63,4282.13 4960.63,4242.13 4980.31,4242.13 5029.53,4192.91 U1.31@5073.82,4192.91 ; C5.2@4951.42,3996.06 U1.41@5073.82,3996.06 5137.8,3996.06 5167.32,3966.54 v1(5511.81,3966.54) ; C10.2@5158.11,3159.45 v1(5285.43,3159.45) ; U1.55@5226.38,3745.08 5226.38,3858.27 5275.58,3907.47 v1(5511.81,3907.48) ; v1(5285.43,3356.3) 5679.13,3356.3 5698.82,3336.61 5698.82,3188.98 5679.13,3169.29 C13.1@5640.39,3169.29 ; C4.2@5286.06,3602.36 C4.2@5286.06,3612.83 ; U1.15@5344.49,4365.16 5344.49,4399.61 5354.33,4409.45 5423.23,4409.45 ; U1.11@5423.23,4365.16 5423.23,4409.45 ; C8.1@5473.07,4606.3 C7.1@5473.07,4507.87 5472.44,4507.24 5472.44,4468.5 5423.23,4419.29 5423.23,4409.45 ; U1.72@5561.02,3745.08 5561.02,3828.74 5570.87,3838.58 v1(5570.87,3907.48) 5580.71,3907.48 5629.92,3956.69 U1.83@5693.9,3956.69 ; U1.97@5693.9,4232.28 5776.93,4232.28 C1.2@5816.3,4232.28 ; C33.2@2499.37,2637.8 2529.53,2637.8 2539.37,2647.64 2539.37,2883.86 2598.43,2942.91 2667.32,2942.91
  Bottom Layer w8: v1(4862.2,4350.39) v1(4862.2,4655.51) ; v1(5285.43,3159.45) v1(5285.43,3356.3) ; v1(5511.81,3966.54) v1(5511.81,3907.48) v1(5570.87,3907.48) ; CONN3.13@5818.5,1890.71 6161.42,2233.62 v1(6161.42,2903.54)
GPIO0.0: CONN1.4 U1.46 | length 3915.2
  Top Layer w8: v1(4881.89,1476.38) 6117.72,1476.38 CONN1.4@6176.77,1417.32 ; v1(4881.89,3868.11) 4911.42,3897.64 U1.46@5073.82,3897.64
  Bottom Layer w8: v1(4881.89,1476.38) v1(4881.89,3868.11)
GPIO0.1: CONN1.5 U1.47 | length 3754.9
  Top Layer w8: v1(4921.26,1505.91) v1(6072.83,1505.91) ; v1(4921.26,3858.27) 4940.94,3877.95 U1.47@5073.82,3877.95
  Bottom Layer w8: v1(4921.26,1505.91) v1(4921.26,3858.27) ; v1(6072.83,1505.91) 6076.77,1501.97 CONN1.5@6076.77,1417.32
GPIO0.4: CONN2.1 U1.81 | length 3717.2
  Top Layer w8: U1.81@5693.9,3917.32 5693.9,3916.28 5817.98,3916.28 v1(5915.35,3818.9) ; v1(5915.35,2165.35) v1(6604.33,2165.35) ; CONN2.1@6476.77,1181.1 v1(6604.33,1181.1)
  Bottom Layer w8: v1(5915.35,2165.35) v1(5915.35,3818.9) ; v1(6604.33,1181.1) v1(6604.33,2165.35)
GPIO0.5: CONN2.2 U1.80 | length 3837.6
  Top Layer w8: U1.80@5693.9,3897.64 5797.24,3897.64 v1(5875.98,3818.9) ; v1(5875.98,2125.98) v1(6574.8,2125.98)
  Bottom Layer w8: v1(5875.98,2125.98) v1(5875.98,3818.9) ; CONN2.2@6376.77,1181.1 6455.51,1102.36 6535.43,1102.36 6574.8,1141.73 v1(6574.8,2125.98)
GPIO0.6: CONN2.3 U1.79 | length 3769
  Top Layer w8: U1.79@5693.9,3877.95 5777.56,3877.95 v1(5836.61,3818.9) ; v1(5836.61,2007.87) v1(6545.28,2007.87) ; CONN2.3@6276.77,1181.1 6276.77,1237.4 6299.21,1259.84 v1(6545.28,1259.84)
  Bottom Layer w8: v1(5836.61,2007.87) v1(5836.61,3818.9) ; v1(6545.28,1259.84) v1(6545.28,2007.87)
GPIO0.15: CONN2.4 U1.62 | length 4291.7
  Top Layer w8: U1.62@5364.17,3745.08 5364.17,3700.79 5452.76,3612.2 v1(5472.43,3612.2) ; v1(5492.13,2224.41) 6662.06,2224.41 v1(6663.39,2223.08) ; CONN2.4@6176.77,1181.1 6176.77,1255.51 6207.1,1285.84 6657.07,1285.84 v1(6663.39,1279.53)
  Bottom Layer w8: v1(5472.43,3612.2) 5492.13,3592.5 5492.13,3412.58 5485.94,3406.39 5485.94,3384.95 5492.13,3378.76 v1(5492.13,2224.41) v1@5482.26,2224.41 ; v1(6663.39,1279.53) v1(6663.39,2223.08)
GPIO0.16: CONN2.5 U1.63 | length 4858.9
  Top Layer w8: v1(4744.09,1279.53) 5282.49,1279.53 5294.65,1291.68 6040.99,1291.68 6076.77,1255.91 CONN2.5@6076.77,1181.1 ; v1(4744.09,1889.76) v1(5246.06,1889.76) ; U1.63@5383.86,3745.08 5383.86,3799.21 5403.54,3818.9 v1(5501.97,3818.9)
  Bottom Layer w8: v1(4744.09,1279.53) v1(4744.09,1889.76) ; v1(5246.06,1889.76) 5246.06,3651.57 5275.59,3681.1 5452.76,3681.1 5501.97,3730.32 v1(5501.97,3818.9)
GPIO0.17: CONN2.6 U1.61 | length 4519.5
  Top Layer w8: U1.61@5344.49,3745.08 5344.49,3690.94 5456.28,3579.15 6630.33,3579.15 v1(6633.86,3582.68) ; CONN2.6@5976.77,1181.1 6025.98,1131.89 v1(6633.86,1131.89)
  Bottom Layer w8: v1(6633.86,1131.89) v1(6633.86,3582.68)
GPIO0.18: CONN2.7 U1.60 | length 4531.5
  Top Layer w8: v1(4773.62,1102.36) 4777.15,1102.36 4812.99,1066.52 5849.98,1066.52 5876.77,1093.31 CONN2.7@5876.77,1181.1 ; v1(4773.62,1929.13) v1(5216.54,1929.13) ; U1.60@5324.8,3745.08 5324.8,3789.37 v1(5344.49,3809.06)
  Bottom Layer w8: v1(4773.62,1102.36) v1(4773.62,1929.13) ; v1(5216.54,1929.13) 5215.06,1930.61 5215.06,3745.59 5278.53,3809.06 v1(5344.49,3809.06)
GPIO0.19: CONN2.8 U1.59 | length 4504.8
  Top Layer w8: v1(5187.01,2194.88) v1(6299.21,2194.88) ; U1.59@5305.12,3745.08 v1(5305.12,3858.27) ; CONN2.8@5776.77,1181.1 CONN2.8@5777.56,1181.89 ; v1(5777.56,1338.58) 5797.24,1358.27 v1(6328.74,1358.27)
  Bottom Layer w8: v1(5187.01,2194.88) 5187.01,3740.16 v1(5305.12,3858.27) ; CONN2.8@5776.77,1181.1 5777.56,1181.89 v1(5777.56,1338.58) ; v1(6299.21,2194.88) 6299.21,1476.38 6328.74,1446.85 v1(6328.74,1358.27)
GPIO0.20: CONN2.9 U1.58 | length 3626.4
  Top Layer w8: v1(5118.11,1092.52) 5639.76,1092.52 5676.77,1129.53 CONN2.9@5676.77,1181.1 ; v1(5118.11,1998.03) v1(5413.39,1998.03) ; U1.58@5285.43,3745.08 5285.43,3710.63 v1(5413.39,3582.68)
  Bottom Layer w8: v1(5118.11,1092.52) v1(5118.11,1998.03) ; v1(5413.39,1998.03) v1(5413.39,3582.68)
GPIO0.21: CONN2.10 U1.57 | length 3493.9
  Top Layer w8: v1(5088.58,1122.05) 5517.72,1122.05 CONN2.10@5576.77,1181.1 ; v1(5088.58,2027.56) v1(5383.86,2027.56) ; U1.57@5265.75,3745.08 5265.75,3691.14 5265.93,3691.14 5374.02,3583.05 v1(5374.02,3582.68)
  Bottom Layer w8: v1(5088.58,1122.05) 5098.43,1122.05 5088.58,1131.89 v1(5088.58,2027.56) ; v1(5374.02,3582.68) 5383.86,3572.83 v1(5383.86,2027.56)
L-CH: CON1.2 IC5.4 TP28.1 | length 1341
  Top Layer w8: TP28.1@2972.44,1860.24 3236.22,1860.24 CON1.2@3238.19,1858.27 3561.02,1858.27 3637.8,1781.5 4143.7,1781.5 4163.39,1801.18 IC5.4@4272.64,1801.18